# Altium PCB Chau_PCB.PcbDoc
Units mm, origin at the board's own origin, x right, y up, seen from the top; angles counter-clockwise.
Board outline 92.2 x 85.6 mm, 2 copper layers (Top Layer, Bottom Layer); 13 components, 24 nets, 83 pads, 16 vias.
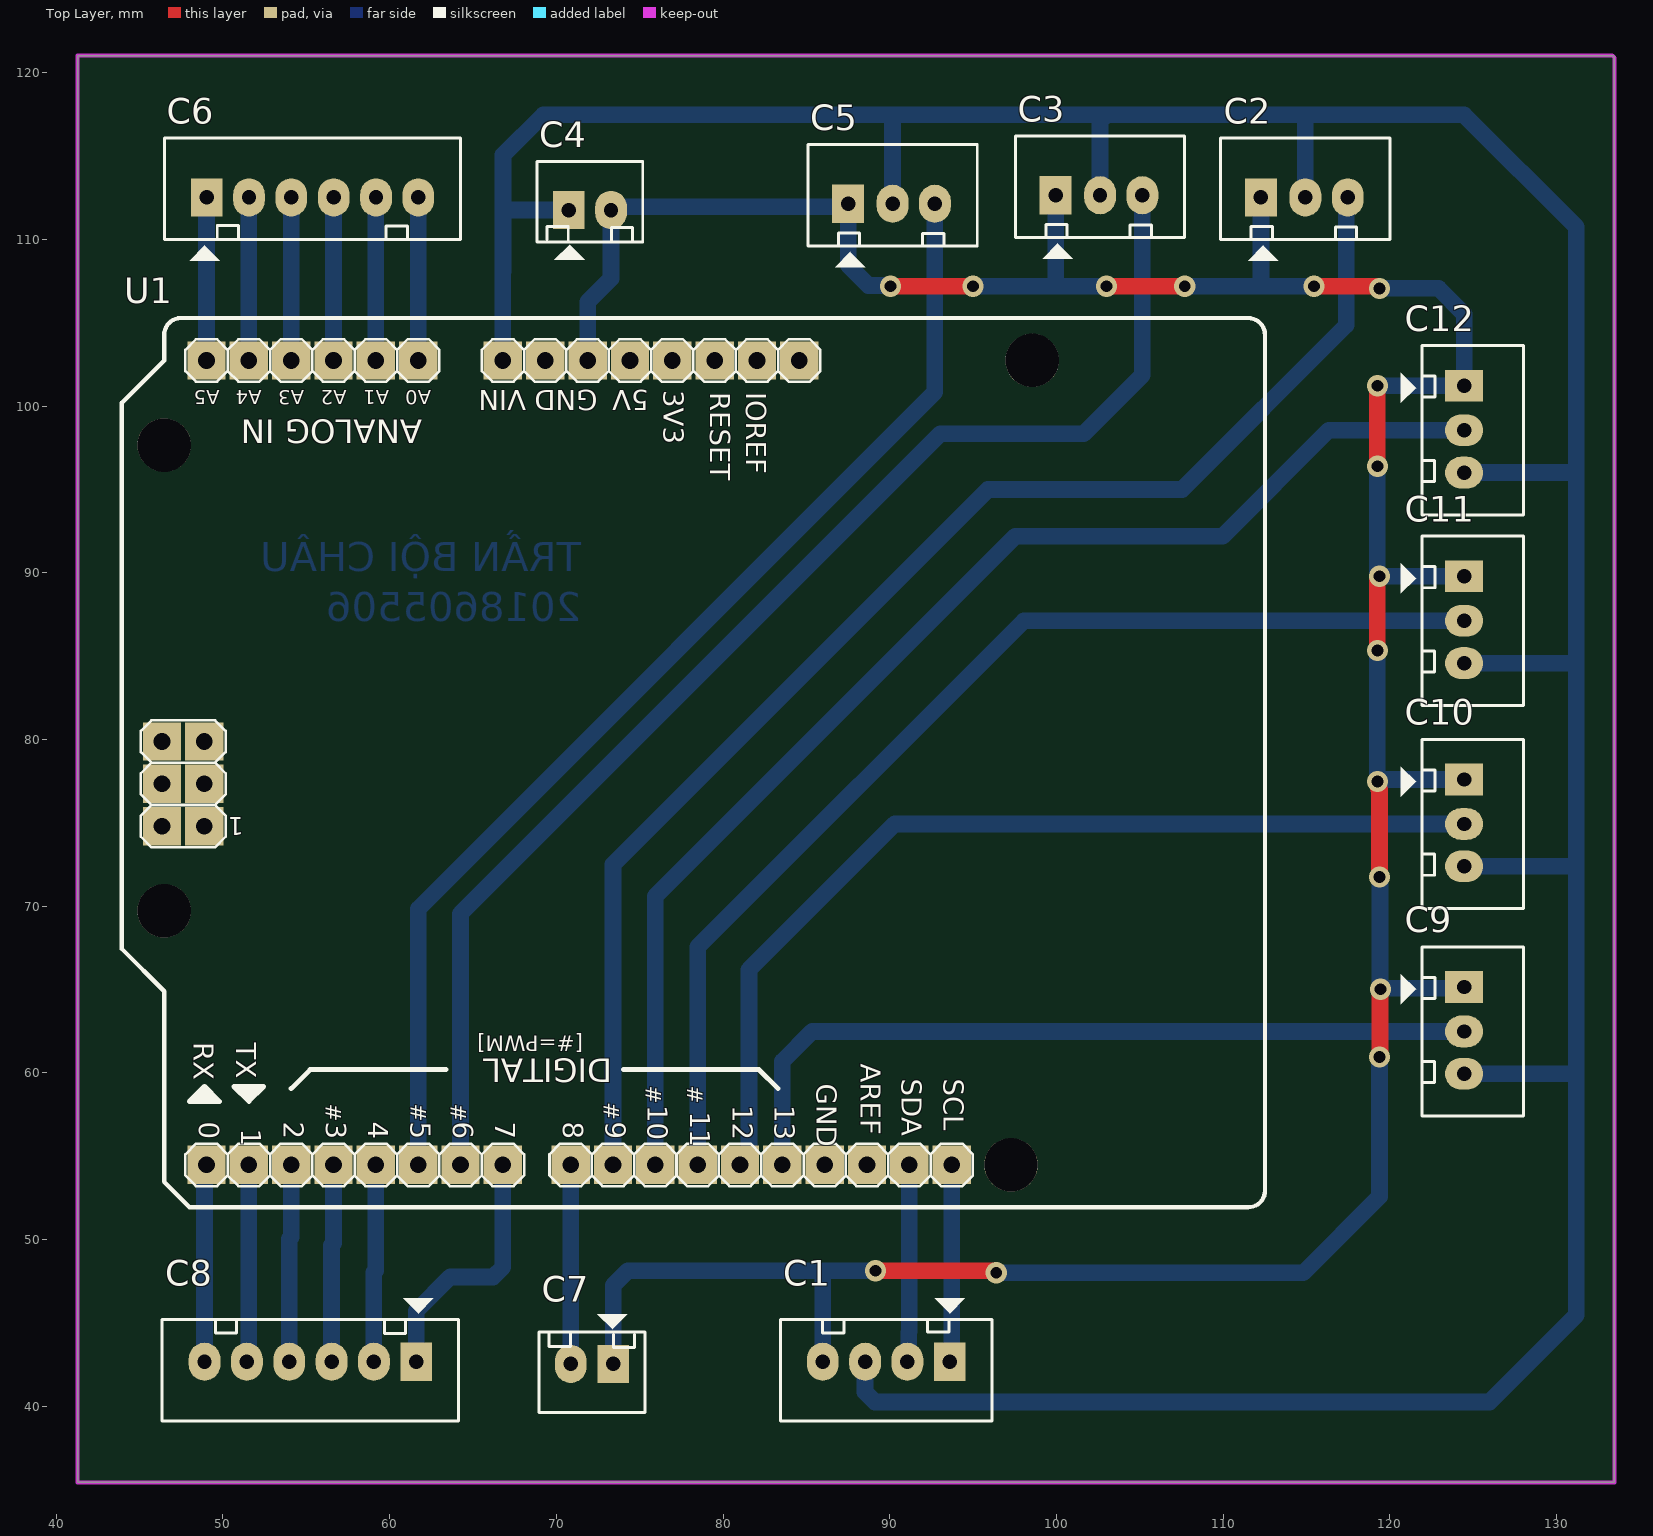
[diagram p0: Top Layer view]
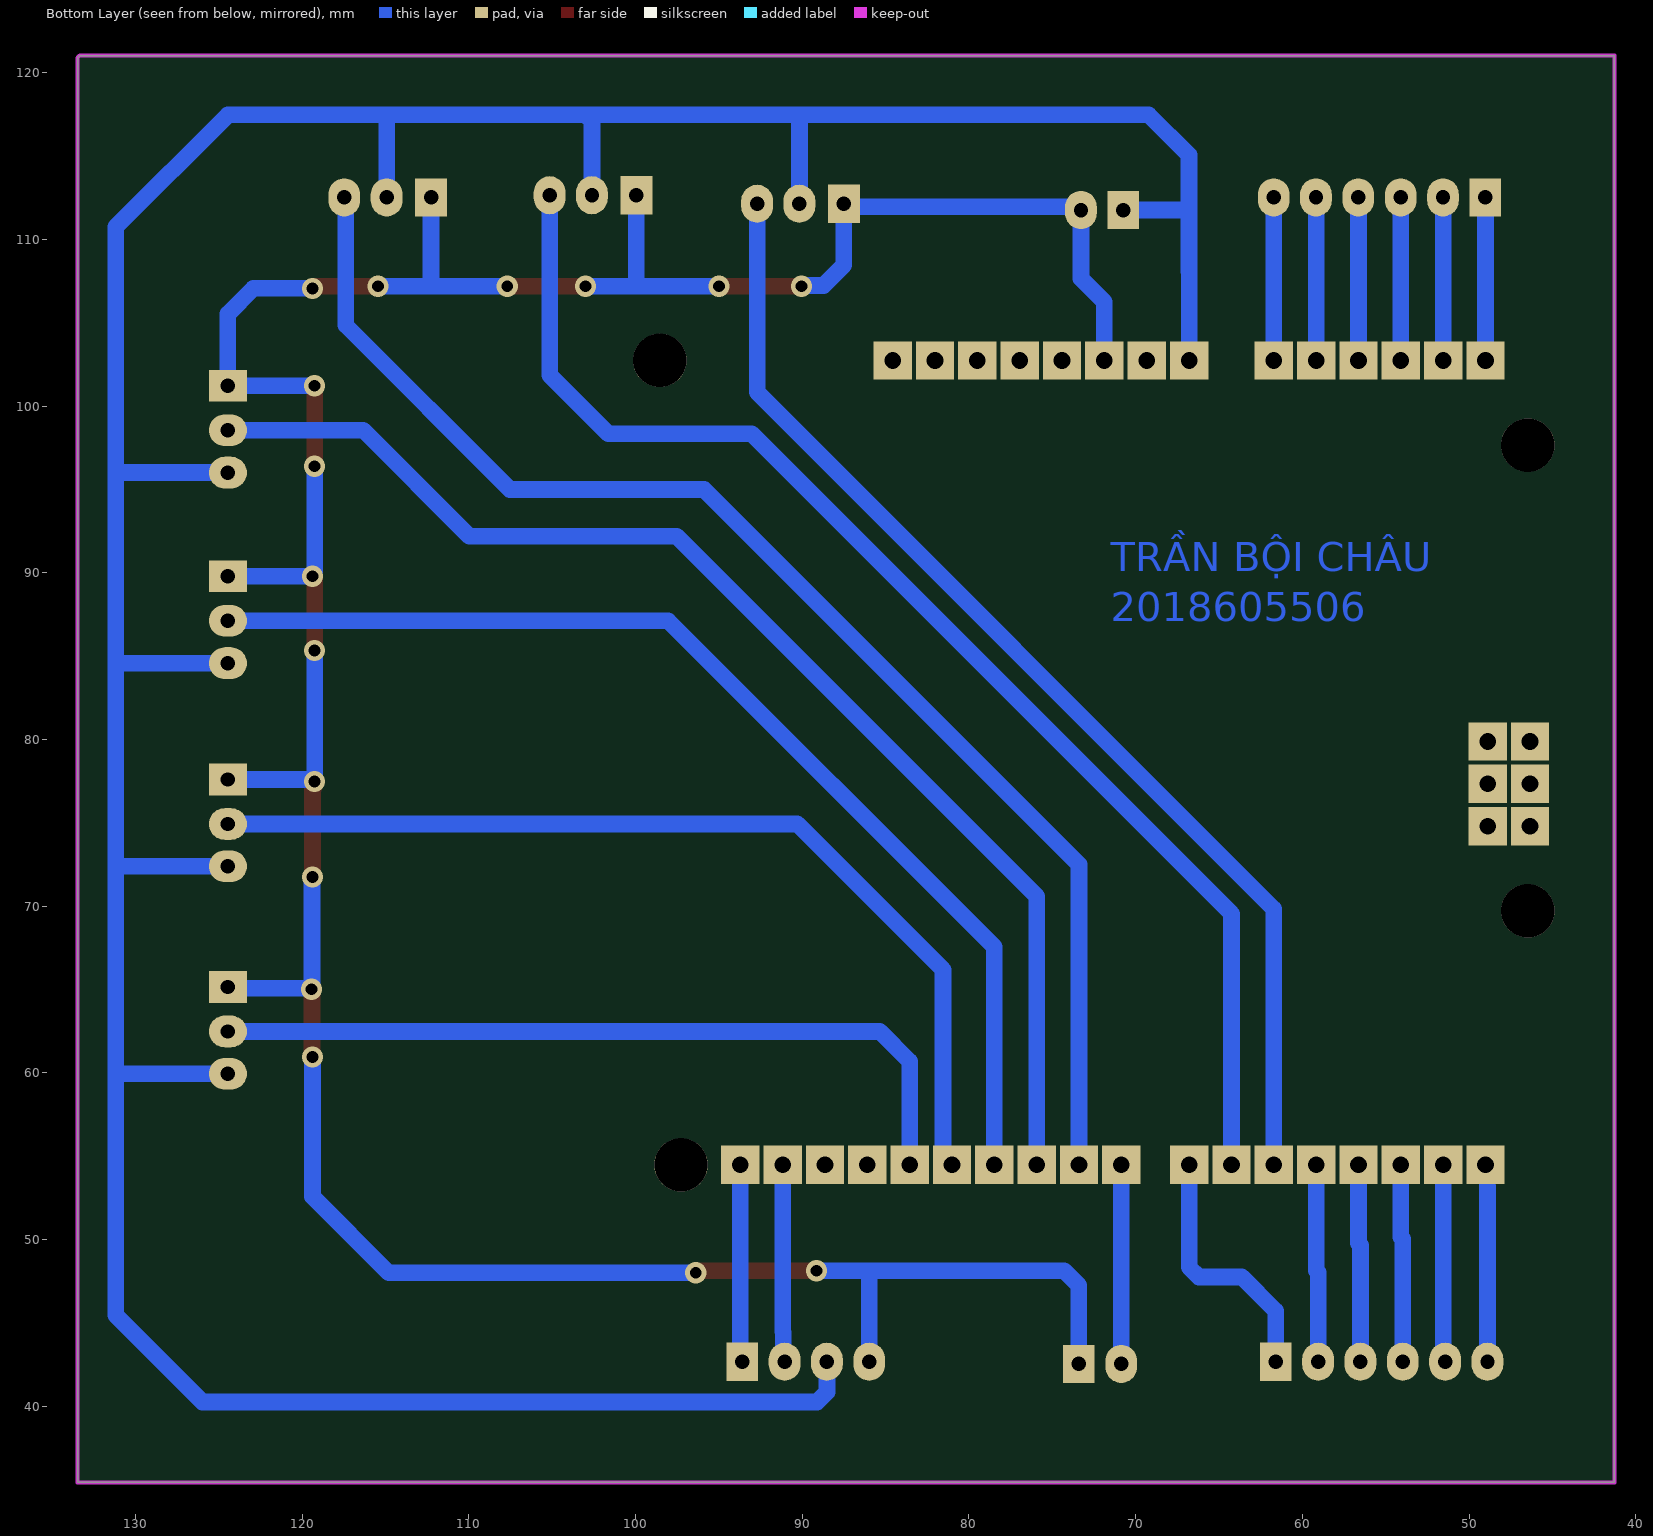
[diagram p1: Bottom Layer view, seen from below]
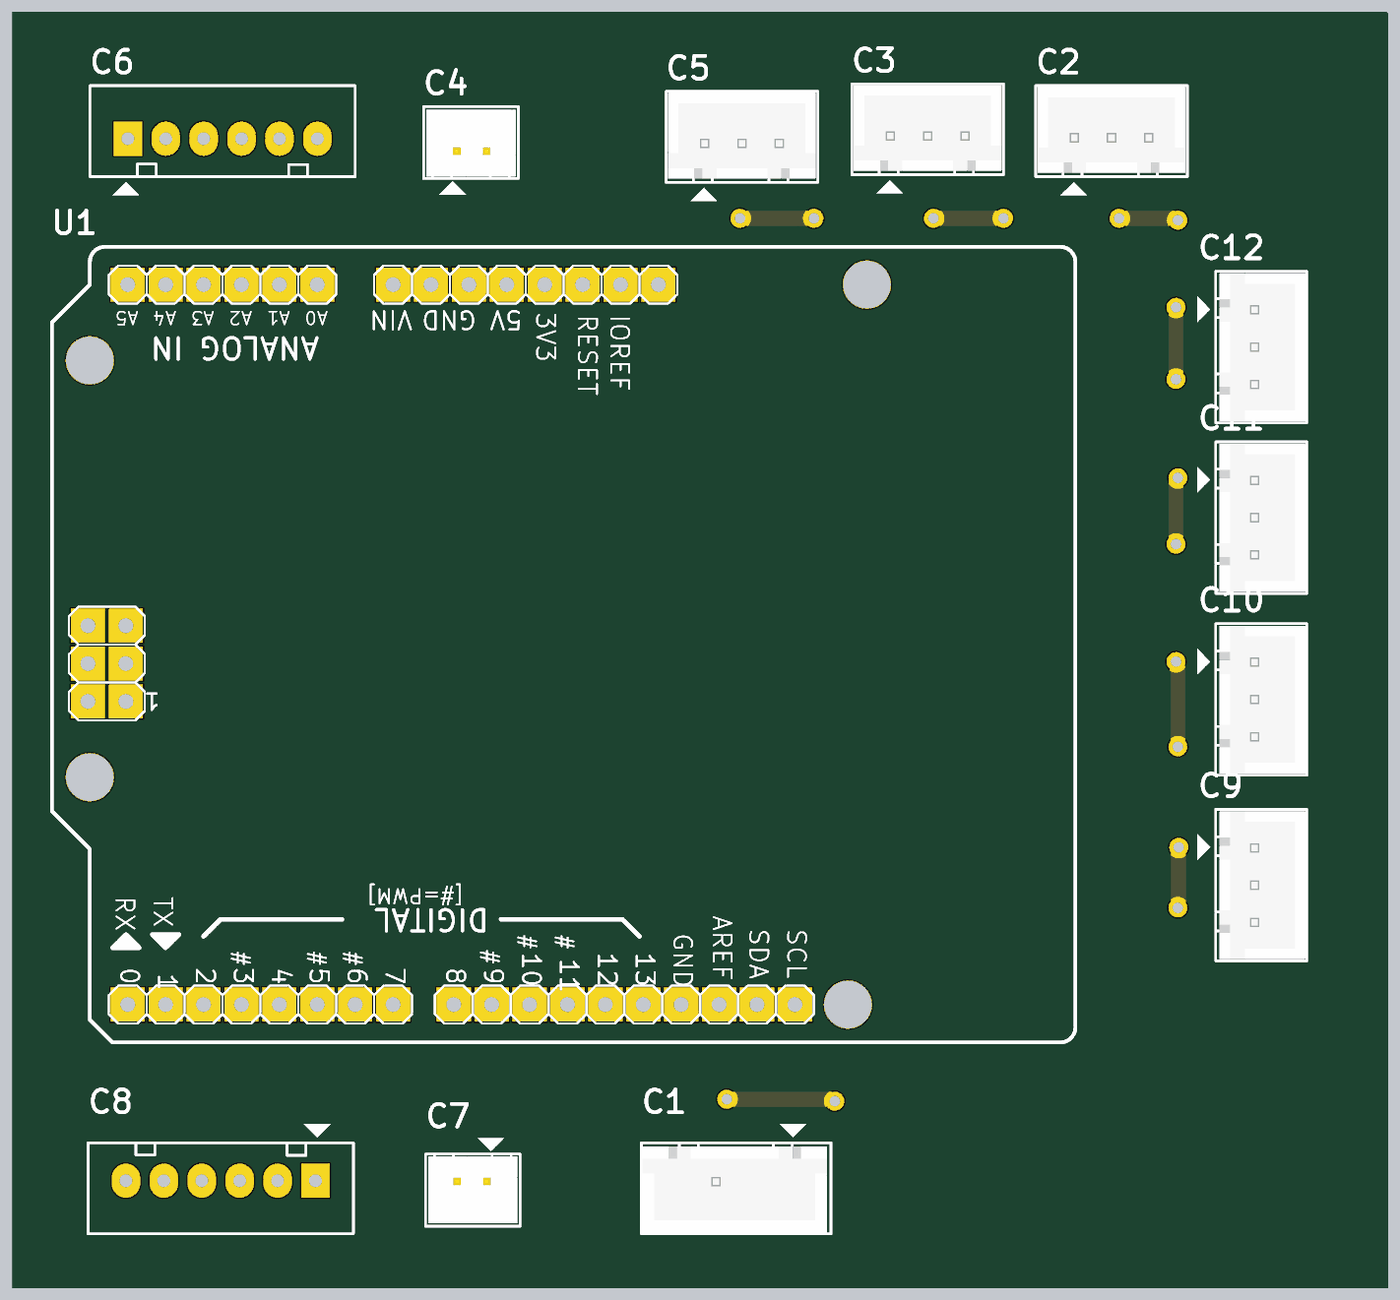
[diagram p2: 3D render of the assembled board from above, using the file's embedded part models]

## Layer stack, top to bottom
Top Solder: solder mask 0.0102, Solder Resist, Dk 3.5
Top Layer: signal copper 0.0356
Dielectric 1: dielectric 0.32, FR-4, Dk 4.8
Bottom Layer: signal copper 0.0356
Bottom Solder: solder mask 0.0102, Solder Resist, Dk 3.5

## Board outline
41.275,35.433 133.477,35.433 133.477,120.904 133.35,121.031 41.275,121.031

## Design rules (kind name [scope] priority, off if disabled: settings)
Clearance [All] p1: gap=1 ignorepadtopadclearanceinfootprint=FALSE
PolygonConnect [All] p1: connectstyle=Relief reliefconductorwidth=0.254 reliefentries=4 polygonreliefangle="90 Angle" airgapwidth=0.254
RoutingVias [All] p1: holewidth=0.711 width=1.27 viastyle="Through Hole" minholewidth=0.711 minwidth=1.27 maxholewidth=0.711 maxwidth=1.27
SolderMaskExpansion [All] p1: expansion=0.102 istentingtop=FALSE
Width [All] p1: maxlimit=1 minlimit=1 preferedwidth=1
30 further rules are at their usual default settings.

## Components (designator, comment, footprint, x,y, rotation, side; value= is the part's Value field where it differs from the comment)
C1 "LCD_I2C" Header4 93.599,42.672 r180 top
C2 "Servo_1" Header3 112.395,112.522 r0 top
C3 "Servo_2" Header3 100.076,112.649 r0 top
C4 "Header2" Header2 70.739,111.76 r0 top
C5 "Servo_3" Header3 87.63,112.141 r0 top
C6 "Header6" Header6 49.022,112.522 r0 top
C7 "Header2" Header2 73.406,42.545 r180 top
C8 "Header7" Header6 61.595,42.672 r180 top
C9 "Sensor 01" Header3 124.46,65.024 r270 top
C10 "Sensor 02" Header3 124.46,77.47 r270 top
C11 "Sensor 03" Header3 124.46,89.662 r270 top
C12 "Sensor 04" Header3 124.46,101.092 r270 top
U1 "Arduino Uno" "Arduino Uno" 76.454,78.74 r180 top

## Footprints (in the part's own frame and the unit in brackets; to place one, negate y for a bottom-side part, rotate by r counter-clockwise, add the part's x,y. Pads: shape width x height; smd on the part's side, far side on the other; paste and mask are expansions set on the pad)
"Arduino Uno" [mm]
  rect 2.3x2.3 hole 1: 0(27.44,24.26) 1(24.9,24.26) 2(22.36,24.26) 3(19.82,24.26) 3V3(-0.5,-24) 4(17.28,24.26) 5(14.74,24.26) 5V(2.04,-24) 6(12.2,24.26) 7(9.66,24.26) 8(5.596,24.26) 9(3.056,24.26) 10(0.516,24.26) 11(-2.024,24.26) 12(-4.564,24.26) 13(-7.104,24.26) A0(14.74,-24) A1(17.28,-24) A2(19.82,-24) A3(22.36,-24) A4(24.9,-24) A5(27.44,-24) AREF(-12.184,24.26) GND1(4.58,-24) GND2(7.12,-24) GND3(-9.644,24.26) ICSP1(27.567,3.94) ICSP2(30.107,3.94) ICSP3(27.567,1.4) ICSP4(30.107,1.4) ICSP5(27.567,-1.14) ICSP6(30.107,-1.14) IOREF(-5.58,-24) NC(-8.12,-24) RESET(-3.04,-24) SCL(-17.264,24.26) SDA(-14.724,24.26) Vin(9.66,-24)
  round 3.2 hole 3.2: H1(-20.82,24.26) H2(-22.09,-24) H3(29.98,-18.92) H4(29.98,9.02)
  Bottom Layer lines w0.305: -14.47,24.26 -14.724,24.26
  silkscreen extent -36.06,-26.54 32.52,26.8
Header2 [mil] "CON2"
  rect 75x90 hole 34: 1(0,0)
  oval 75x90 hole 34: 2(100,0)
  silkscreen extent -75,-118 175,115, body extent -68,-70 168,107, height 236
Header3 [mil] "CON 3"
  rect 75x90 hole 34: 1(-5,0)
  oval 75x90 hole 34: 2(100,0) 3(200,0)
  silkscreen extent -100,-150 300,140, body extent -95,-90 295,136, height 276
Header4 [mil] "CON4"
  rect 75x90 hole 34: 1(0,0)
  oval 75x90 hole 34: 2(100,0) 3(200,0) 4(300,0)
  silkscreen extent -100,-150 400,140, body extent -90,-90 398,136, height 276
Header6 [mil] "CON6"
  rect 75x90 hole 34: 1(0,0)
  oval 75x90 hole 34: 2(100,0) 3(200,0) 4(300,0) 5(400,0) 6(500,0)
  silkscreen extent -100,-150 600,140

## Part data
C1: library part Header4, "Header IDC, 4 x 1 Pin Vertical 2.54mm Pitch (Non-Boxed, Male)", Manufacturer="W¨¹rth Elektronik eiSos GmbH", partNo=613002143121, ComponentLink1 Description=Manufacturer, ComponentLink1URL=http://www.we-online.com, ComponentLink2 Description=Datasheet, ComponentLink2URL=http://katalog.we-online.de/em/datasheet/6130xx143121.pdf, Created by="Karrer Zheng", Created Date="29 March 2013", NoPins=02
C2 C3 C5 C9 C10 C11 C12: library part Header3, "Header IDC, 3 x 1 Pin Vertical 2.54mm Pitch (Non-Boxed, Male)", Manufacturer="W¨¹rth Elektronik eiSos GmbH", partNo=613002143121, ComponentLink1 Description=Manufacturer, ComponentLink1URL=http://www.we-online.com, ComponentLink2 Description=Datasheet, ComponentLink2URL=http://katalog.we-online.de/em/datasheet/6130xx143121.pdf, Created by="Karrer Zheng", Created Date="29 March 2013", NoPins=02
C4 C7: "Header IDC, 2 x 1 Pin Vertical 2.54mm Pitch (Non-Boxed, Male)", Manufacturer="W¨¹rth Elektronik eiSos GmbH", partNo=613002143121, ComponentLink1 Description=Manufacturer, ComponentLink1URL=http://www.we-online.com, ComponentLink2 Description=Datasheet, ComponentLink2URL=http://katalog.we-online.de/em/datasheet/6130xx143121.pdf, Created by="Karrer Zheng", Created Date="29 March 2013", NoPins=02
C6: "Header IDC, 6 x 1 Pin Vertical 2.54mm Pitch (Non-Boxed, Male)", Manufacturer="W¨¹rth Elektronik eiSos GmbH", partNo=613002143121, ComponentLink1 Description=Manufacturer, ComponentLink1URL=http://www.we-online.com, ComponentLink2 Description=Datasheet, ComponentLink2URL=http://katalog.we-online.de/em/datasheet/6130xx143121.pdf, Created by="Karrer Zheng", Created Date="29 March 2013", NoPins=02
C8: library part Header6, "Header IDC, 6 x 1 Pin Vertical 2.54mm Pitch (Non-Boxed, Male)", Manufacturer="W¨¹rth Elektronik eiSos GmbH", partNo=613002143121, ComponentLink1 Description=Manufacturer, ComponentLink1URL=http://www.we-online.com, ComponentLink2 Description=Datasheet, ComponentLink2URL=http://katalog.we-online.de/em/datasheet/6130xx143121.pdf, Created by="Karrer Zheng", Created Date="29 March 2013", NoPins=02

## Via types
v1: diameter 1.27, hole 0.711, Top Layer to Bottom Layer, 16 vias

## Nets (pads, with @x,y where several pads share a name; then routed paths per layer and width w, separated by ;. In a path a pad name is that pad's centre, name@x,y a point inside that pad or via, vN(x,y) a via of type N, cw(c..) or ccw(c..) an arc to the next point about the centre after c; other vN are vias at no path point)
A0: C6.6 U1.A0 | length 9.8
  Bottom Layer w1: U1.A0 61.718,102.744 61.718,112.518 C6.6
A1: C6.5 U1.A1 | length 9.8
  Bottom Layer w1: U1.A1 59.174,112.514 C6.5
A2: C6.4 U1.A2 | length 9.8
  Bottom Layer w1: U1.A2 56.634,112.514 C6.4
A3: C6.3 U1.A3 | length 9.8
  Bottom Layer w1: U1.A3 54.094,112.514 C6.3
A4: C6.2 U1.A4 | length 9.8
  Bottom Layer w1: U1.A4 51.554,112.514 C6.2
A5: C6.1 U1.A5 | length 9.8
  Bottom Layer w1: U1.A5 49.014,112.514 C6.1
GND: C1.4 C2.1 C3.1 C4.2 C5.1 C7.1 C9.1 C10.1 C11.1 C12.1 U1.GND1 | length 209
  Top Layer w1: v1(89.154,48.133) 96.193,48.133 96.32,48.006 v1(96.393,48.006) ; v1(90.043,107.188) v1(94.996,107.188) ; v1(102.997,107.188) v1(107.696,107.188) ; v1(115.443,107.188) 119.18,107.188 119.307,107.061 v1(119.38,107.061) ; v1(119.253,77.47) 119.305,77.418 119.305,77.091 119.38,77.016 v1(119.38,71.755) ; v1(119.253,85.344) 119.253,89.589 119.38,89.716 v1(119.38,89.789) ; v1(119.253,96.393) v1(119.253,101.219) ; v1(119.38,60.96) 119.41,60.99 119.41,64.989 v1(119.441,65.019)
  Bottom Layer w1: U1.GND1 71.874,106.243 73.279,107.648 C4.2 73.469,111.95 87.312,111.95 C5.1 87.503,108.458 88.721,107.24 89.991,107.24 v1(90.043,107.188) ; C7.1 73.406,47.244 74.295,48.133 85.979,48.133 ; C1.4 85.979,48.133 ; v1(89.154,48.133) 85.979,48.133 ; v1(94.996,107.188) v1(102.997,107.188) ; v1(96.393,48.006) 114.808,48.006 119.38,52.578 v1(119.38,60.96) ; 99.695,107.188 99.949,107.442 C3.1 ; v1(107.696,107.188) 112.268,107.188 ; C2.1 112.268,107.188 ; v1(115.443,107.188) 112.268,107.188 ; v1(119.253,85.344) v1(119.253,77.47) 119.326,77.47 119.453,77.597 C10.1 ; v1(119.253,96.393) 119.253,90.107 119.328,90.032 119.328,89.841 v1(119.38,89.789) C11.1 ; v1(119.253,101.219) C12.1 124.46,105.537 122.936,107.061 v1(119.38,107.061) ; v1(119.38,71.755) 119.41,71.725 119.41,65.05 v1(119.441,65.019) 119.493,65.071 124.38,65.071 C9.1
IO0: C8.6 U1.0 | length 10.5
  Bottom Layer w1: C8.6 48.895,53.204 48.904,53.213
IO1: C8.5 U1.1 | length 11.9
  Bottom Layer w1: C8.5 51.435,43.162 51.554,43.281 U1.1
IO2: C8.4 U1.2 | length 11.9
  Bottom Layer w1: C8.4 53.975,50.038 54.094,50.157 U1.2
IO3: C8.3 U1.3 | length 11.9
  Bottom Layer w1: C8.3 56.515,49.657 56.634,49.776 U1.3
IO4: C8.2 U1.4 | length 11.9
  Bottom Layer w1: C8.2 59.055,48.022 59.174,48.141 U1.4
IO7: C8.1 U1.7 | length 15.5
  Bottom Layer w1: C8.1 61.595,45.72 63.627,47.752 66.208,47.752 66.794,48.338 U1.7
L298_IN: C7.2 U1.8 | length 11.9
  Bottom Layer w1: U1.8 70.862,54.476 70.862,42.549 C7.2
SCL: C1.1 U1.SCL | length 11.9
  Bottom Layer w1: C1.1 93.718,42.791 U1.SCL
SDA: C1.2 U1.SDA | length 11.9
  Bottom Layer w1: C1.2 91.146,42.759 91.146,44.436 91.178,44.468 U1.SDA
SERVO_1: C2.3 U1.9 | length 83.1
  Bottom Layer w1: U1.9 73.398,72.509 95.885,94.996 107.535,94.996 117.388,104.849 117.388,112.435 C2.3
SERVO_2: C3.3 U1.6 | length 80.1
  Bottom Layer w1: U1.6 64.254,69.554 93.045,98.344 101.646,98.344 105.156,101.854 C3.3
SERVO_3: C5.3 U1.5 | length 70.5
  Bottom Layer w1: U1.5 61.714,69.842 92.71,100.838 C5.3
SS_1: C9.2 U1.13 | length 47.9
  Bottom Layer w1: U1.13 83.558,60.698 85.344,62.484 C9.2
SS_2: C10.2 U1.12 | length 58.5
  Bottom Layer w1: U1.12 81.558,55.02 81.558,66.191 90.297,74.93 C10.2
SS_3: C11.2 U1.11 | length 67.2
  Bottom Layer w1: U1.11 78.478,67.556 98.044,87.122 C11.2
SS_4: C12.2 U1.10 | length 76.2
  Bottom Layer w1: U1.10 75.938,70.604 97.536,92.202 109.982,92.202 116.332,98.552 C12.2
VCC5: C1.3 C2.2 C3.2 C4.1 C5.2 C9.3 C10.3 C11.3 C12.3 U1.Vin | length 239.1
  Bottom Layer w1: U1.Vin 66.794,108.069 66.802,108.077 66.802,111.76 ; C4.1 66.802,111.76 ; C1.3 88.519,40.845 89.105,40.259 125.984,40.259 131.191,45.466 131.191,59.817 ; C5.2 90.17,117.348 90.043,117.475 ; C3.2 102.616,117.094 102.997,117.475 ; C2.2 114.935,117.348 115.062,117.475 ; C9.3 131.064,59.944 131.191,59.817 ; C10.3 131.191,72.39 ; C11.3 131.064,84.582 131.191,84.455 ; C12.3 131.064,96.012 131.191,95.885 ; 66.802,111.76 66.802,115.062 69.215,117.475 90.043,117.475 ; 90.043,117.475 102.616,117.475 102.997,117.475 ; 102.997,117.475 115.062,117.475 ; 115.062,117.475 124.46,117.475 131.191,110.744 131.191,95.885 ; 131.191,59.817 131.191,72.39 ; 131.191,72.39 131.191,84.455 ; 131.191,84.455 131.191,95.885
pads on no net: U1.3V3 U1.5V U1.AREF U1.GND2 U1.GND3 U1.H1 U1.H2 U1.H3 U1.H4 U1.ICSP1 U1.ICSP2 U1.ICSP3 U1.ICSP4 U1.ICSP5 U1.ICSP6 U1.IOREF U1.NC U1.RESET

## Keep-outs
Keep-Out Layer:
  lines w0.254: 41.275,35.433 41.91,35.433 133.477,35.433 133.477,38.735 133.477,120.904 133.35,121.031 41.275,121.031 41.275,35.433

## Other copper
Bottom Layer:
  text "TRẦN BỘI CHÂU  / 2018605506" at 71.501,86.487 h3

## Text inside footprints (layer, text, board x,y; h text height)
U1: Top Overlay "5V" at 75.557,100.962 h1.21 r180; Top Overlay "A0" at 62.501,100.937 h0.86 r180; Top Overlay "ANALOG IN" at 61.968,99.184 h1.42 r180; Top Overlay "AREF" at 88.268,60.537 h1.21 r270; Top Overlay "1" at 51.249,75.333 h1.08 r180; Top Overlay "GND" at 85.626,59.354 h1.21 r270; Top Overlay "RESET" at 79.24,100.835 h1.21 r270; Top Overlay "3V3" at 76.446,100.962 h1.21 r270; Top Overlay "A1" at 59.961,100.937 h0.86 r180; Top Overlay "A2" at 57.421,100.937 h0.86 r180; Top Overlay "A3" at 54.881,100.937 h0.86 r180; Top Overlay "A4" at 52.341,100.937 h0.86 r180; Top Overlay "A5" at 49.801,100.937 h0.86 r180; Top Overlay "VIN" at 68.191,100.962 h1.21 r180; Top Overlay "GND" at 72.484,100.962 h1.21 r180; Top Overlay "IOREF" at 81.399,100.835 h1.21 r270; Top Overlay "DIGITAL" at 73.347,60.855 h1.42 r180; Top Overlay "TX" at 50.792,61.821 h1.21 r270; Top Overlay "RX" at 48.252,61.846 h1.21 r270; Top Overlay "13" at 83.111,58.071 h1.21 r270; Top Overlay "12" at 80.571,58.071 h1.21 r270; Top Overlay "11" at 78.031,57.668 h1.21 r270; Top Overlay "10" at 75.491,58.071 h1.21 r270; Top Overlay "9" at 72.951,57.064 h1.21 r270; Top Overlay "8" at 70.411,57.064 h1.21 r270; Top Overlay "7" at 66.347,57.064 h1.21 r270; Top Overlay "6" at 63.807,57.064 h1.21 r270; Top Overlay "5" at 61.267,57.064 h1.21 r270; Top Overlay "4" at 58.727,57.064 h1.21 r270; Top Overlay "3" at 56.187,57.064 h1.21 r270; Top Overlay "2" at 53.647,57.064 h1.21 r270; Top Overlay "1" at 51.107,56.661 h1.21 r270; Top Overlay "0" at 48.567,57.064 h1.21 r270; Top Overlay "[#=PWM]" at 71.62,62.227 h0.95 r180; Top Overlay "#" at 77.854,59.24 h0.95 r270; Top Overlay "#" at 75.354,59.24 h0.95 r270; Top Overlay "#" at 61.254,58.14 h0.95 r270; Top Overlay "#" at 56.154,58.14 h0.95 r270; Top Overlay "#" at 63.654,58.14 h0.95 r270; Top Overlay "#" at 72.854,58.24 h0.95 r270; Top Overlay "SCL" at 93.254,59.64 h1.21 r270; Top Overlay "SDA" at 90.725,59.653 h1.21 r270